# EAGLE board adafruit permaproto quarterbreadboard (EAGLE 5.01)
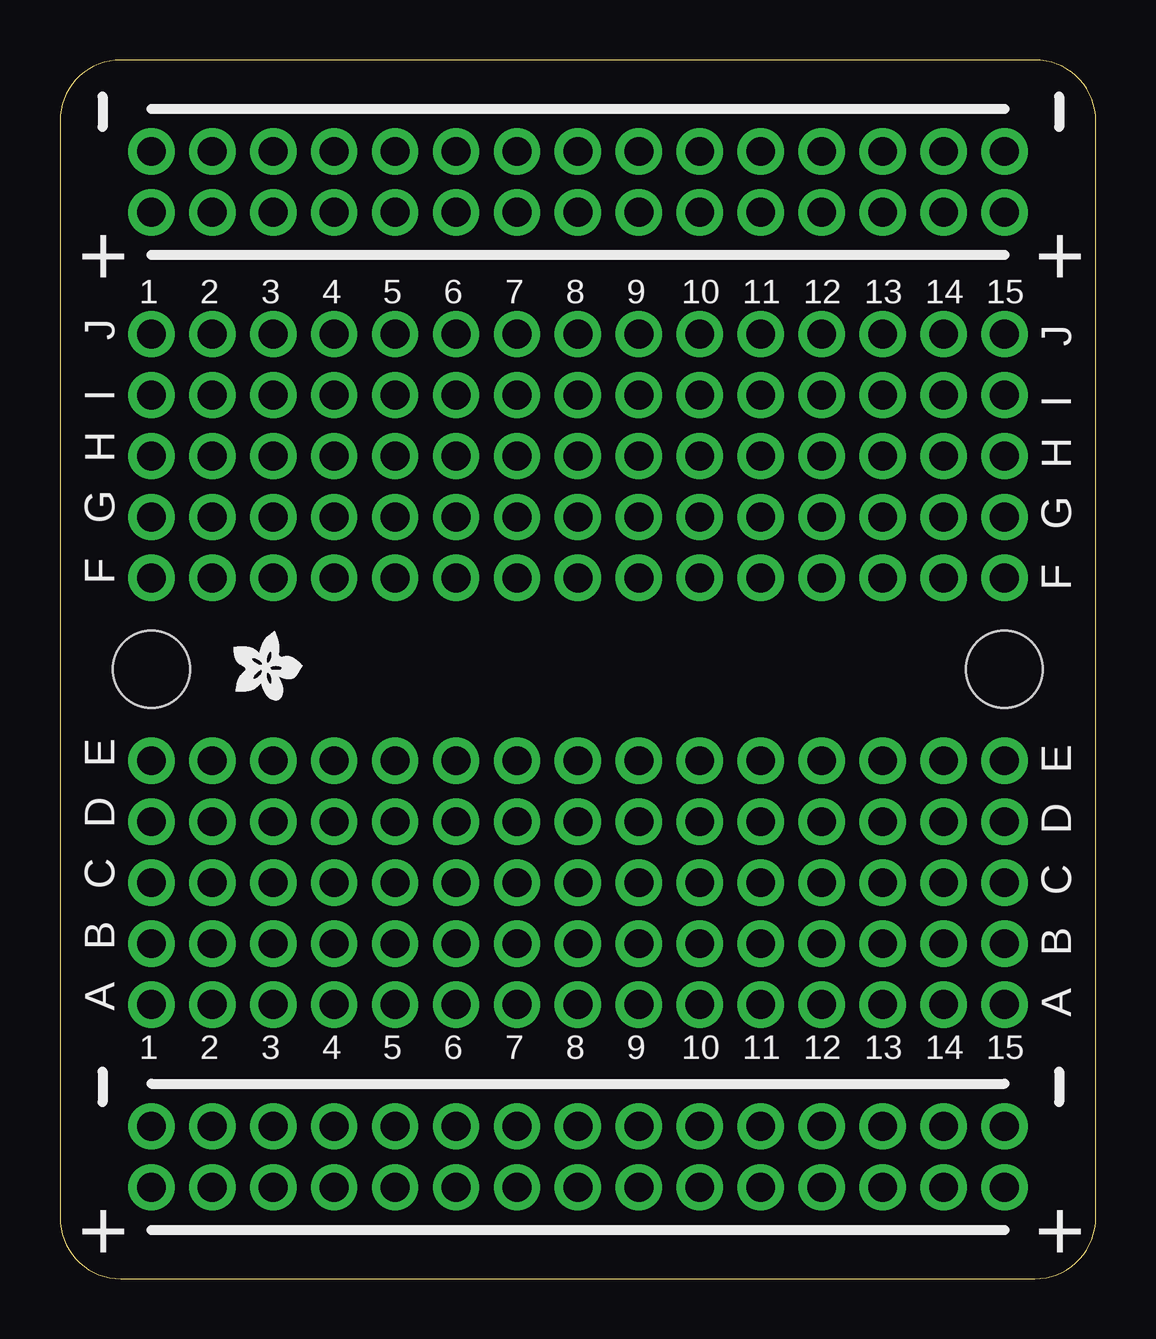
[diagram p0: board, top side]
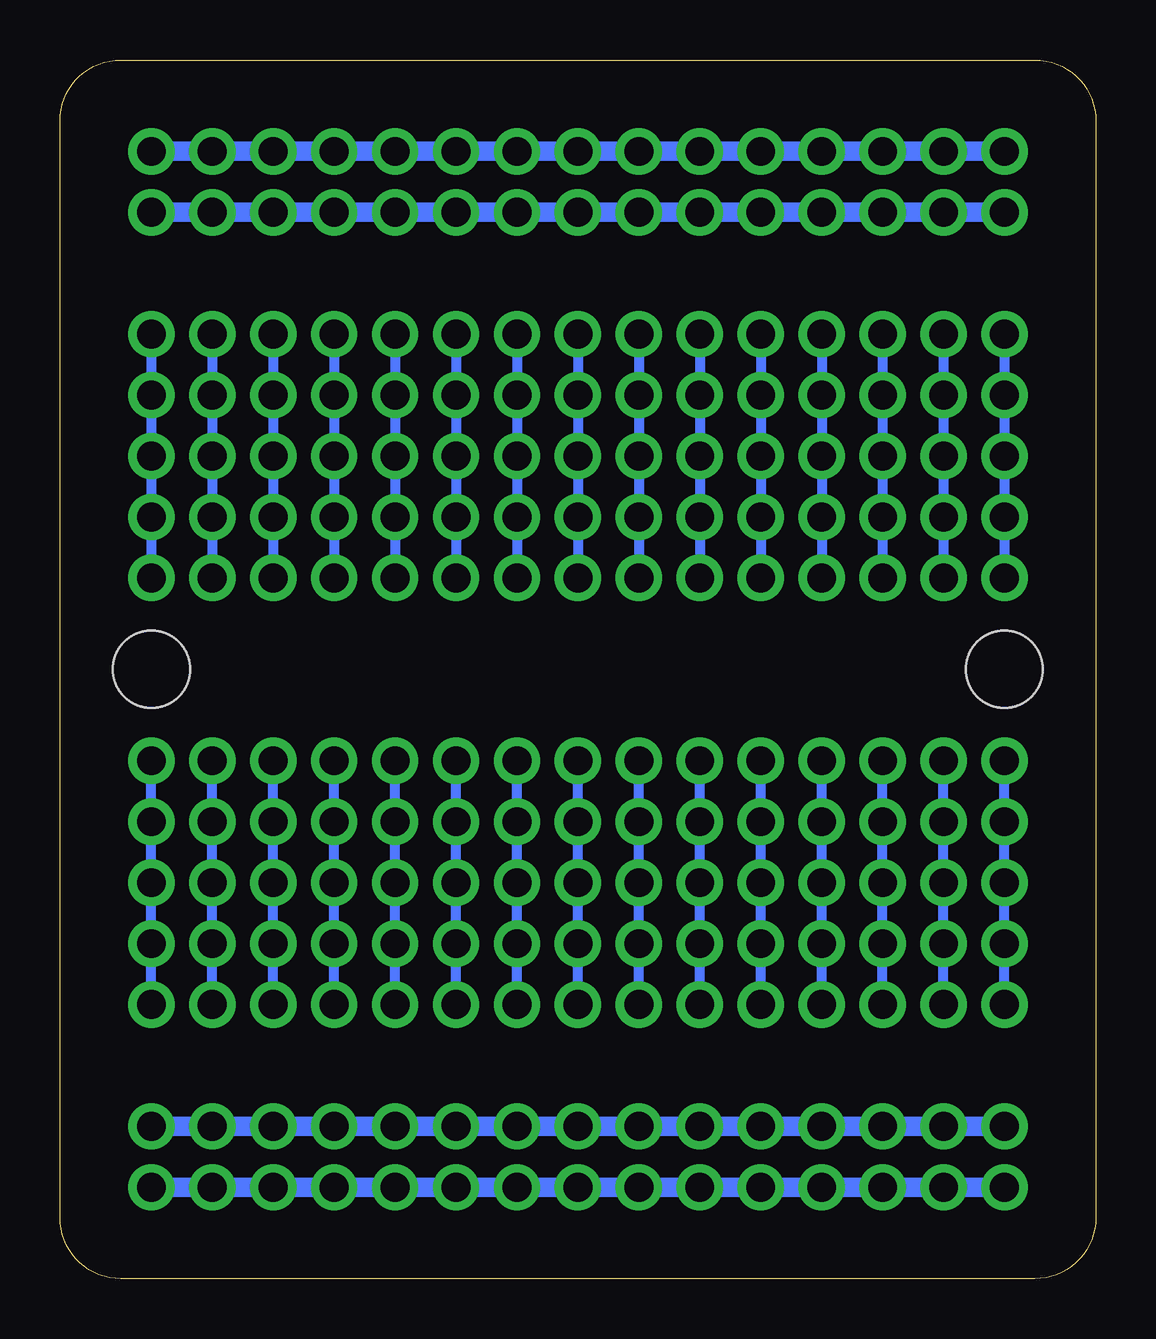
[diagram p1: board, bottom side, seen from below]

Size 43.18 x 50.8 mm. Coordinates in mm from the lower left corner, seen from the top.
Outline: 2.54,50.8 arc90 0,48.26 0,2.54 arc90 2.54,0 40.64,0 arc90 43.18,2.54 43.18,48.26 arc90 40.64,50.8 2.54,50.8
Copper layers (1*16): Top 0.035mm / dielectric 1.5mm / Bottom 0.035mm
Design rules "default": minimum track width 10mil, minimum drill 24mil, track to track 8mil, track to pad 8mil, pad to pad 8mil, via to via 8mil, smd to smd 8mil, copper to edge 40mil, drill to drill 8mil, minimum pad ring 10mil, minimum via ring 8mil, stop-mask expansion 4mil, vias tented up to drill 0mil, thermal gap 10mil
Holes 3.2 mm at 3.81,25.4 39.37,25.4

## Placement (x,y rotation side)
U$1  [ADAFRUIT200MIL]  8.64,25.65 270 top

## Library data of the parts
U$1 = adafruit

## Tracks (layer width: path | path; a pad name or v marks a point on that pad's centre or on a via)
N$1  (via drill 1.2 pad 1.93)
  Bottom 0.406: v3.81,21.59 v3.81,19.05 v3.81,16.51 v3.81,13.97 v3.81,11.43
N$2  (via drill 1.2 pad 1.93)
  Bottom 0.406: v6.35,11.43 v6.35,13.97 v6.35,16.51 v6.35,19.05 v6.35,21.59
N$3  (via drill 1.2 pad 1.93)
  Bottom 0.406: v8.89,21.59 v8.89,19.05 v8.89,16.51 v8.89,13.97 v8.89,11.43
N$4  (via drill 1.2 pad 1.93)
  Bottom 0.406: v11.43,11.43 v11.43,13.97 v11.43,16.51 v11.43,19.05 v11.43,21.59
N$5  (via drill 1.2 pad 1.93)
  Bottom 0.406: v13.97,21.59 v13.97,19.05 v13.97,16.51 v13.97,13.97 v13.97,11.43
N$6  (via drill 1.2 pad 1.93)
  Bottom 0.406: v16.51,11.43 v16.51,13.97 v16.51,16.51 v16.51,19.05 v16.51,21.59
N$7  (via drill 1.2 pad 1.93)
  Bottom 0.406: v21.59,11.43 v21.59,13.97 v21.59,16.51 v21.59,19.05 v21.59,21.59
N$8  (via drill 1.2 pad 1.93)
  Bottom 0.406: v19.05,21.59 v19.05,19.05 v19.05,16.51 v19.05,13.97 v19.05,11.43
N$9  (via drill 1.2 pad 1.93)
  Bottom 0.406: v24.13,21.59 v24.13,19.05 v24.13,16.51 v24.13,13.97 v24.13,11.43
N$10  (via drill 1.2 pad 1.93)
  Bottom 0.406: v26.67,21.59 v26.67,19.05 v26.67,16.51 v26.67,13.97 v26.67,11.43
N$11  (via drill 1.2 pad 1.93)
  Bottom 0.406: v29.21,21.59 v29.21,19.05 v29.21,16.51 v29.21,13.97 v29.21,11.43
N$12  (via drill 1.2 pad 1.93)
  Bottom 0.406: v31.75,11.43 v31.75,13.97 v31.75,16.51 v31.75,19.05 v31.75,21.59
N$13  (via drill 1.2 pad 1.93)
  Bottom 0.406: v34.29,21.59 v34.29,19.05 v34.29,16.51 v34.29,13.97 v34.29,11.43
N$14  (via drill 1.2 pad 1.93)
  Bottom 0.406: v36.83,11.43 v36.83,13.97 v36.83,16.51 v36.83,19.05 v36.83,21.59
N$15  (via drill 1.2 pad 1.93)
  Bottom 0.406: v39.37,11.43 v39.37,13.97 v39.37,16.51 | v39.37,16.51 v39.37,19.05 | v39.37,19.05 v39.37,21.59 | v39.37,16.51 v39.37,19.05
N$31  (via drill 1.2 pad 1.93)
  Bottom 0.813: v3.81,6.35 v6.35,6.35 v8.89,6.35 v11.43,6.35 v13.97,6.35 v16.51,6.35 v19.05,6.35 v21.59,6.35 v24.13,6.35 v26.67,6.35 v29.21,6.35 v31.75,6.35 v34.29,6.35 v36.83,6.35 v39.37,6.35
N$32  (via drill 1.2 pad 1.93)
  Bottom 0.813: v3.81,3.81 v6.35,3.81 v8.89,3.81 v11.43,3.81 v13.97,3.81 v16.51,3.81 v19.05,3.81 v21.59,3.81 v24.13,3.81 v26.67,3.81 v29.21,3.81 v31.75,3.81 v34.29,3.81 v36.83,3.81 v39.37,3.81
N$48  (via drill 1.2 pad 1.93)
  Bottom 0.406: v39.37,29.21 v39.37,31.75 v39.37,34.29 v39.37,36.83 v39.37,39.37
N$49  (via drill 1.2 pad 1.93)
  Bottom 0.406: v34.29,29.21 v34.29,31.75 v34.29,34.29 v34.29,36.83 v34.29,39.37
N$50  (via drill 1.2 pad 1.93)
  Bottom 0.406: v36.83,39.37 v36.83,36.83 v36.83,34.29 v36.83,31.75 v36.83,29.21
N$51  (via drill 1.2 pad 1.93)
  Bottom 0.406: v31.75,29.21 v31.75,31.75 v31.75,34.29 v31.75,36.83 v31.75,39.37
N$52  (via drill 1.2 pad 1.93)
  Bottom 0.406: v29.21,39.37 v29.21,36.83 v29.21,34.29 v29.21,31.75 v29.21,29.21
N$53  (via drill 1.2 pad 1.93)
  Bottom 0.406: v24.13,39.37 v24.13,36.83 v24.13,34.29 v24.13,31.75 v24.13,29.21
N$54  (via drill 1.2 pad 1.93)
  Bottom 0.406: v26.67,29.21 v26.67,31.75 v26.67,34.29 v26.67,36.83 v26.67,39.37
N$55  (via drill 1.2 pad 1.93)
  Bottom 0.406: v21.59,29.21 v21.59,31.75 v21.59,34.29 v21.59,36.83 v21.59,39.37
N$56  (via drill 1.2 pad 1.93)
  Bottom 0.406: v19.05,39.37 v19.05,36.83 v19.05,34.29 v19.05,31.75 v19.05,29.21
N$57  (via drill 1.2 pad 1.93)
  Bottom 0.406: v16.51,29.21 v16.51,31.75 v16.51,34.29 v16.51,36.83 v16.51,39.37
N$58  (via drill 1.2 pad 1.93)
  Bottom 0.406: v13.97,39.37 v13.97,36.83 v13.97,34.29 v13.97,31.75 v13.97,29.21
N$59  (via drill 1.2 pad 1.93)
  Bottom 0.406: v8.89,29.21 v8.89,31.75 v8.89,34.29 v8.89,36.83 v8.89,39.37
N$60  (via drill 1.2 pad 1.93)
  Bottom 0.406: v11.43,39.37 v11.43,36.83 v11.43,34.29 v11.43,31.75 v11.43,29.21
N$61  (via drill 1.2 pad 1.93)
  Bottom 0.406: v6.35,29.21 v6.35,31.75 v6.35,34.29 v6.35,36.83 v6.35,39.37
N$62  (via drill 1.2 pad 1.93)
  Bottom 0.406: v3.81,39.37 v3.81,36.83 v3.81,34.29 v3.81,31.75 v3.81,29.21
N$63  (via drill 1.2 pad 1.93)
  Bottom 0.813: v39.37,44.45 v36.83,44.45 v34.29,44.45 v31.75,44.45 | v29.21,44.45 v31.75,44.45 | v29.21,44.45 v26.67,44.45 v24.13,44.45 v21.59,44.45 v19.05,44.45 v16.51,44.45 v13.97,44.45 | v13.97,44.45 v11.43,44.45 | v11.43,44.45 v8.89,44.45 v6.35,44.45 v3.81,44.45 | v13.97,44.45 v11.43,44.45 | v29.21,44.45 v31.75,44.45
N$64  (via drill 1.2 pad 1.93)
  Bottom 0.813: v39.37,46.99 v36.83,46.99 v34.29,46.99 v31.75,46.99 | v29.21,46.99 v31.75,46.99 | v29.21,46.99 v26.67,46.99 v24.13,46.99 v21.59,46.99 v19.05,46.99 v16.51,46.99 v13.97,46.99 | v13.97,46.99 v11.43,46.99 | v11.43,46.99 v8.89,46.99 v6.35,46.99 v3.81,46.99 | v13.97,46.99 v11.43,46.99 | v29.21,46.99 v31.75,46.99

## Text on the board
tPlace: 1 | 2 | 3 | 4 | 5 | 6 | 7 | 8 | 9 | 10 | 11 | 12 | 13 | 14 | 15 | J | J | I | I | H | H | G | G | F | F | E | E | D | D | C | C | B | B | A | A | 1 | 2 | 3 | 4 | 5 | 6 | 7 | 8 | 9 | 10 | 11 | 12 | 13 | 14 | 15
tDocu: Adafruit Perma-Proto | 1/4 Sized Breadboard
tPlaceRed: + | + | + | +